# Altium PCB FlexiblePart.PcbDoc
Units mm, origin at the board's own origin, x right, y up, seen from the top; angles counter-clockwise.
Board outline 78.87 x 15.02 mm, 4 copper layers (Top Layer, Internal Plane 1, Internal Plane 2, Bottom Layer), stack 0.462 mm thick; 25 components, 18 nets, 76 pads, 0 vias.
Unrouted connection lines stored in the file: 42.
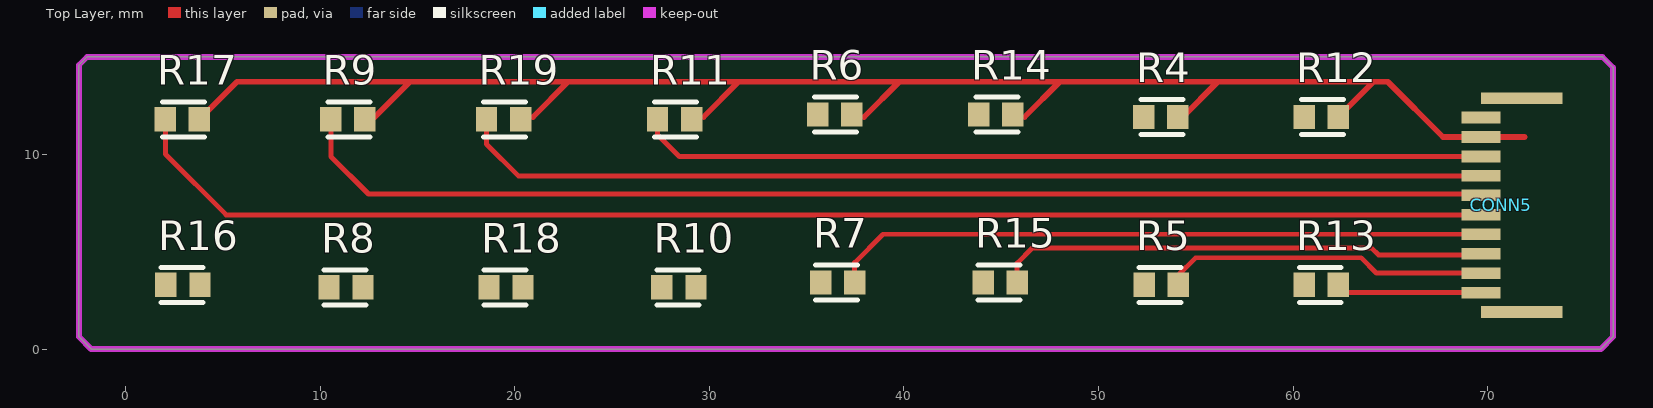
[diagram p0: Top Layer view]
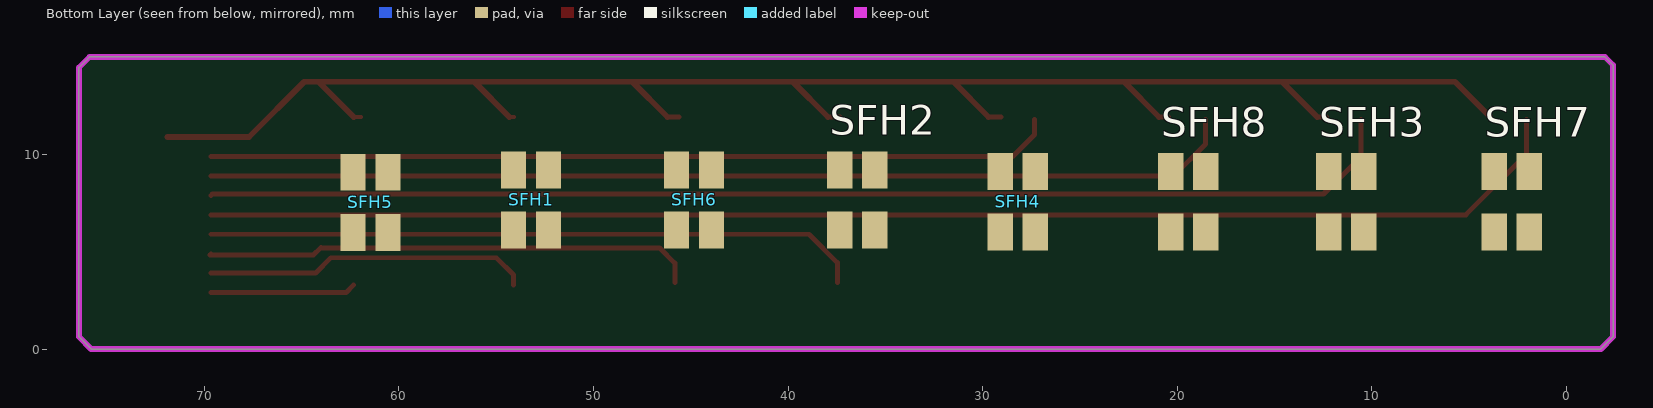
[diagram p1: Bottom Layer view, seen from below]
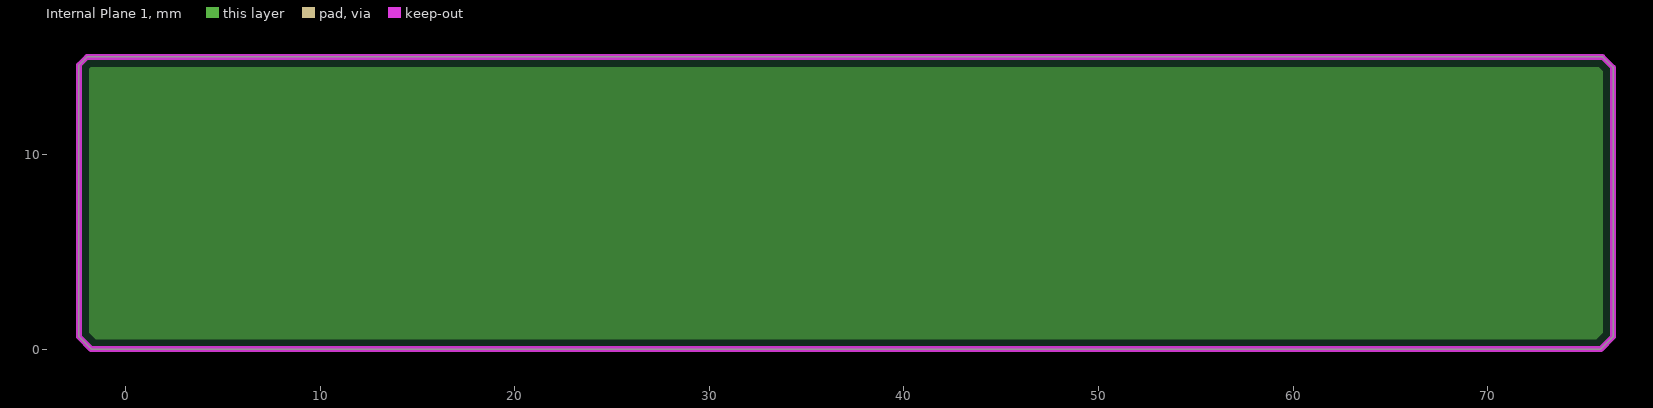
[diagram p2: Internal Plane 1, clearances drawn from the general rule]
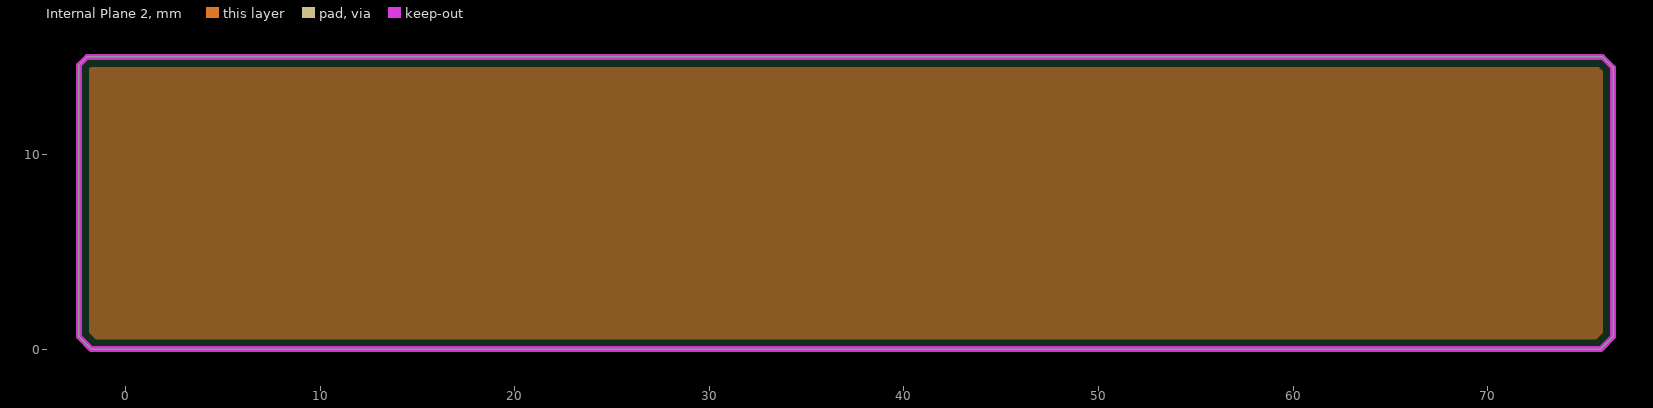
[diagram p3: Internal Plane 2, clearances drawn from the general rule]

## Layer stack, top to bottom
Top Solder: solder mask 0.0102, Solder Resist, Dk 3.5
Top Layer: signal copper 0.0356
Internal Plane 1: plane copper 0.0356
Internal Plane 2: plane copper 0.0356
Dielectric 1: dielectric 0.32, FR-4, Dk 4.8
Bottom Layer: signal copper 0.0356
Bottom Solder: solder mask 0.0102, Solder Resist, Dk 3.5

## Board outline
-2.413,0.635 -2.413,14.605 -1.995,15.023 75.909,15.023 76.454,14.478 76.454,0.635 75.819,0 -1.778,0

## Design rules (kind name [scope] priority, off if disabled: settings)
Clearance [All] p1: gap=0.203 ignorepadtopadclearanceinfootprint=FALSE
PlaneClearance [All] p1: clearance=0.508
PlaneConnect [All] p1: planeconnectstyle=Relief reliefexpansion=0.508 reliefentries=4 reliefconductorwidth=0.254 reliefairgap=0.254
PolygonConnect [All] p1: connectstyle=Relief reliefconductorwidth=0.254 reliefentries=4 polygonreliefangle="90 Angle" airgapwidth=0.254
RoomDefinition FlexiblePart [InComponentClass('FlexiblePart')] p1: confinementstyle=ConfineIn formatcopy=TRUE lockcomponents=FALSE outline -2.286,-0.381 76.454,-0.381 76.454,15.621 -2.286,15.621
RoutingVias [All] p1: holewidth=0.635 width=1.016 viastyle="Through Hole" minholewidth=0.711 minwidth=1.27 maxholewidth=0.711 maxwidth=1.27
SolderMaskExpansion [All] p1: expansion=0.102
Width [All] p1: maxlimit=0.3 minlimit=0.203 preferedwidth=0.203 bottomlayer_maxwidth=0.203 minimp=50.000000 maximp=50.000000 favimp=50.000000
28 further rules are at their usual default settings.

## Components (designator, comment, footprint, x,y, rotation, side; value= is the part's Value field where it differs from the comment)
CONN5 "10_pin_connector" 10Pin_1mmpitch_FFC_FCP_ZIF 71.755,1.905 r90 top
R4 "1k" Resistor_1608 54.074,11.938 r180 top
R5 "100" Resistor_1608 52.352,3.302 r0 top
R6 "1k" Resistor_1608 37.31,12.065 r180 top
R7 "100" Resistor_1608 35.715,3.429 r0 top
R8 "1k" Resistor_1608 10.442,3.175 r0 top
R9 "100" Resistor_1608 12.291,11.811 r180 top
R10 "1k" Resistor_1608 27.559,3.175 r0 top
R11 "100" Resistor_1608 29.083,11.811 r180 top
R12 "1k" Resistor_1608 62.329,11.938 r180 top
R13 "100" Resistor_1608 60.579,3.302 r0 top
R14 "1k" Resistor_1608 45.593,12.065 r180 top
R15 "100" Resistor_1608 44.069,3.429 r0 top
R16 "1k" Resistor_1608 2.06,3.302 r0 top
R17 "100" Resistor_1608 3.782,11.811 r180 top
R18 "1k" Resistor_1608 18.669,3.175 r0 top
R19 "100" Resistor_1608 20.292,11.811 r180 top
SFH1 "SFH 7250" SFH_SENSOR_34x30 53.213,7.62 r0 bottom
SFH2 "SFH 7250" SFH_SENSOR_34x30 36.449,7.62 r0 bottom
SFH3 "SFH 7250" SFH_SENSOR_34x30 11.303,7.62 r180 bottom
SFH4 "SFH 7250" SFH_SENSOR_34x30 28.194,7.62 r180 bottom
SFH5 "SFH 7250" SFH_SENSOR_34x30 61.468,7.493 r0 bottom
SFH6 "SFH 7250" SFH_SENSOR_34x30 44.831,7.62 r0 bottom
SFH7 "SFH 7250" SFH_SENSOR_34x30 2.794,7.62 r180 bottom
SFH8 "SFH 7250" SFH_SENSOR_34x30 19.431,7.62 r180 bottom

## Footprints (in the part's own frame and the unit in brackets; to place one, negate y for a bottom-side part, rotate by r counter-clockwise, add the part's x,y. Pads: shape width x height; smd on the part's side, far side on the other; paste and mask are expansions set on the pad)
10Pin_1mmpitch_FFC_FCP_ZIF [mm]
  rect 0.6x2 smd: 1(1,2.1) 2(2,2.1) 3(3,2.1) 4(4,2.1) 5(5,2.1) 6(6,2.1) 7(7,2.1) 8(8,2.1) 9(9,2.1) 10(10,2.1)
  rect 0.6x4.2 smd: GND(0,0) GND(11,0)
  body extent 0,-2.5 11,1.6, height 1
Resistor_1608 [mm]
  rect 1.1x1.25 smd: Res_p1(0,0) Res_p2(1.75,0)
  silkscreen extent -0.26,-0.9 1.9,0.9, body extent -0.4,-0.7 2.2,0.7, height 1.5
SFH_SENSOR_34x30 [mm]
  rect 1.3x1.9 smd: LED_Anode(-0.9,-1.6) LED_Cathode(-0.9,1.5) PhT_Collector(0.9,1.5) PhT_Emitter(0.9,-1.6)
  body extent -1.6,-1.8 1.6,1.6, height 1.8

## Part data
CONN5: "10 Pin Connector"
R4 R5 R6 R7 R8 R9 R10 R11 R12 R13 R14 R15 R16 R17 R18 R19: library part Resistor_SMD, "SMD Resistor", Manifacturer=Vishay
SFH1 SFH2 SFH3 SFH4 SFH5 SFH6 SFH7 SFH8: library part Photoreflector, "Infrared Emitter - PhTransistor Receiver", Manifacturer=OSram

## Nets (pads, with @x,y where several pads share a name; then routed paths per layer and width w, separated by ;. In a path a pad name is that pad's centre, name@x,y a point inside that pad or via, vN(x,y) a via of type N, cw(c..) or ccw(c..) an arc to the next point about the centre after c; other vN are vias at no path point)
3V3: CONN5.9 R4.Res_p1 R5.Res_p1 R6.Res_p1 R7.Res_p1 R8.Res_p1 R9.Res_p1 R10.Res_p1 R11.Res_p1 R12.Res_p1 R13.Res_p1 R14.Res_p1 R15.Res_p1 R16.Res_p1 R17.Res_p1 R18.Res_p1 R19.Res_p1 | length 91.2
  Top Layer w0.203: R4.Res_p1 R4.Res_p1@54.328,11.938 ; R12.Res_p1@61.948,11.938 R12.Res_p1
  Top Layer w0.254: R9.Res_p1@12.319,11.938 R9.Res_p1@12.799,11.938 ; R19.Res_p1@20.447,11.938 20.927,11.938 ; R11.Res_p1@29.055,11.938 29.69,11.938 ; R6.Res_p1@37.338,11.938 37.945,11.938 ; R14.Res_p1@45.593,11.938 46.2,11.938
  Top Layer w0.3: R17.Res_p1@3.909,11.938 5.715,13.744 14.605,13.744 ; R9.Res_p1@12.799,11.938 14.605,13.744 ; 20.927,11.938 22.733,13.744 ; 29.69,11.938 31.496,13.744 ; 37.945,11.938 39.751,13.744 ; 46.2,11.938 48.006,13.744 ; R4.Res_p1@54.328,11.938 56.134,13.744 ; R12.Res_p1 64.135,13.744 ; 71.899,10.905 CONN5.9 67.708,10.905 64.869,13.744 64.135,13.744 ; 14.605,13.744 22.733,13.744 ; 22.733,13.744 31.496,13.744 ; 31.496,13.744 39.751,13.744 ; 39.751,13.744 48.006,13.744 ; 48.006,13.744 56.134,13.744 ; 56.134,13.744 64.135,13.744
GND: CONN5.10 CONN5.GND SFH1.LED_Cathode SFH1.PhT_Emitter SFH2.LED_Cathode SFH2.PhT_Emitter SFH3.LED_Cathode SFH3.PhT_Emitter SFH4.LED_Cathode SFH4.PhT_Emitter SFH5.LED_Cathode SFH5.PhT_Emitter SFH6.LED_Cathode SFH6.PhT_Emitter SFH7.LED_Cathode SFH7.PhT_Emitter SFH8.LED_Cathode SFH8.PhT_Emitter
NetR4_Res_p2: R4.Res_p2 SFH1.LED_Anode
NetR6_Res_p2: R6.Res_p2 SFH2.LED_Anode
NetR8_Res_p2: R8.Res_p2 SFH3.LED_Anode
NetR10_Res_p2: R10.Res_p2 SFH4.LED_Anode
NetR12_Res_p2: R12.Res_p2 SFH5.LED_Anode
NetR14_Res_p2: R14.Res_p2 SFH6.LED_Anode
NetR16_Res_p2: R16.Res_p2 SFH7.LED_Anode
NetR18_Res_p2: R18.Res_p2 SFH8.LED_Anode
S0: CONN5.1 R13.Res_p2 SFH5.PhT_Collector | length 7.5
  Top Layer w0.254: R13.Res_p2 62.726,2.905 CONN5.1
S1: CONN5.2 R5.Res_p2 SFH1.PhT_Collector | length 16.8
  Top Layer w0.254: R5.Res_p2 54.102,3.81 54.991,4.699 63.5,4.699 64.294,3.905 CONN5.2
S2: CONN5.3 R15.Res_p2 SFH6.PhT_Collector | length 25.5
  Top Layer w0.254: R15.Res_p2 45.819,4.417 46.609,5.207 64.008,5.207 64.019,5.218 64.4,4.837 69.723,4.837 CONN5.3
S3: CONN5.4 R7.Res_p2 SFH2.PhT_Collector | length 33.8
  Top Layer w0.254: R7.Res_p2 37.465,4.445 38.925,5.905 CONN5.4
S4: CONN5.5 R17.Res_p2 SFH7.PhT_Collector | length 70.7
  Top Layer w0.254: R17.Res_p2 2.032,10.033 5.16,6.905 CONN5.5
S5: CONN5.6 R9.Res_p2 SFH3.PhT_Collector | length 61.8
  Top Layer w0.254: R9.Res_p2 10.541,9.906 12.472,7.975 69.585,7.975 CONN5.6
S6: CONN5.7 R19.Res_p2 SFH8.PhT_Collector | length 53.1
  Top Layer w0.254: R19.Res_p2 18.542,10.541 20.178,8.905 CONN5.7
S7: CONN5.8 R11.Res_p2 SFH4.PhT_Collector | length 43.6
  Top Layer w0.254: R11.Res_p2 27.333,11.021 28.449,9.905 CONN5.8

## Keep-outs
Keep-Out Layer:
  lines w0.3: -2.413,0.635 -1.778,0 0,0 74.893,0 75.819,0 76.454,0.635 76.454,5.317 76.454,9.706 76.454,14.478 75.909,15.023 74.893,15.023 0,15.023 -1.995,15.023 -2.413,14.605 -2.413,8.854 -2.413,6.169 -2.413,0.635

## Silkscreen, mask and mechanical layers (free items; w line width, h text height)
Drill Drawing:
  text ".LEGEND" at -14.732,20.193 h1.52
  text "Drill Drawing." at 72.771,-11.176 h1.52

## Dimensions
7.493,0 to 74.893,0 on Mechanical 1